# Altium PCB Panel_Drum_Water_Op3.PcbDoc
Units mm, origin at the board's own origin, x right, y up, seen from the top; angles counter-clockwise.
Board outline 285 x 285 mm, 2 copper layers (Top Layer, Bottom Layer); 19 components, 0 nets, 83 pads, 0 vias.
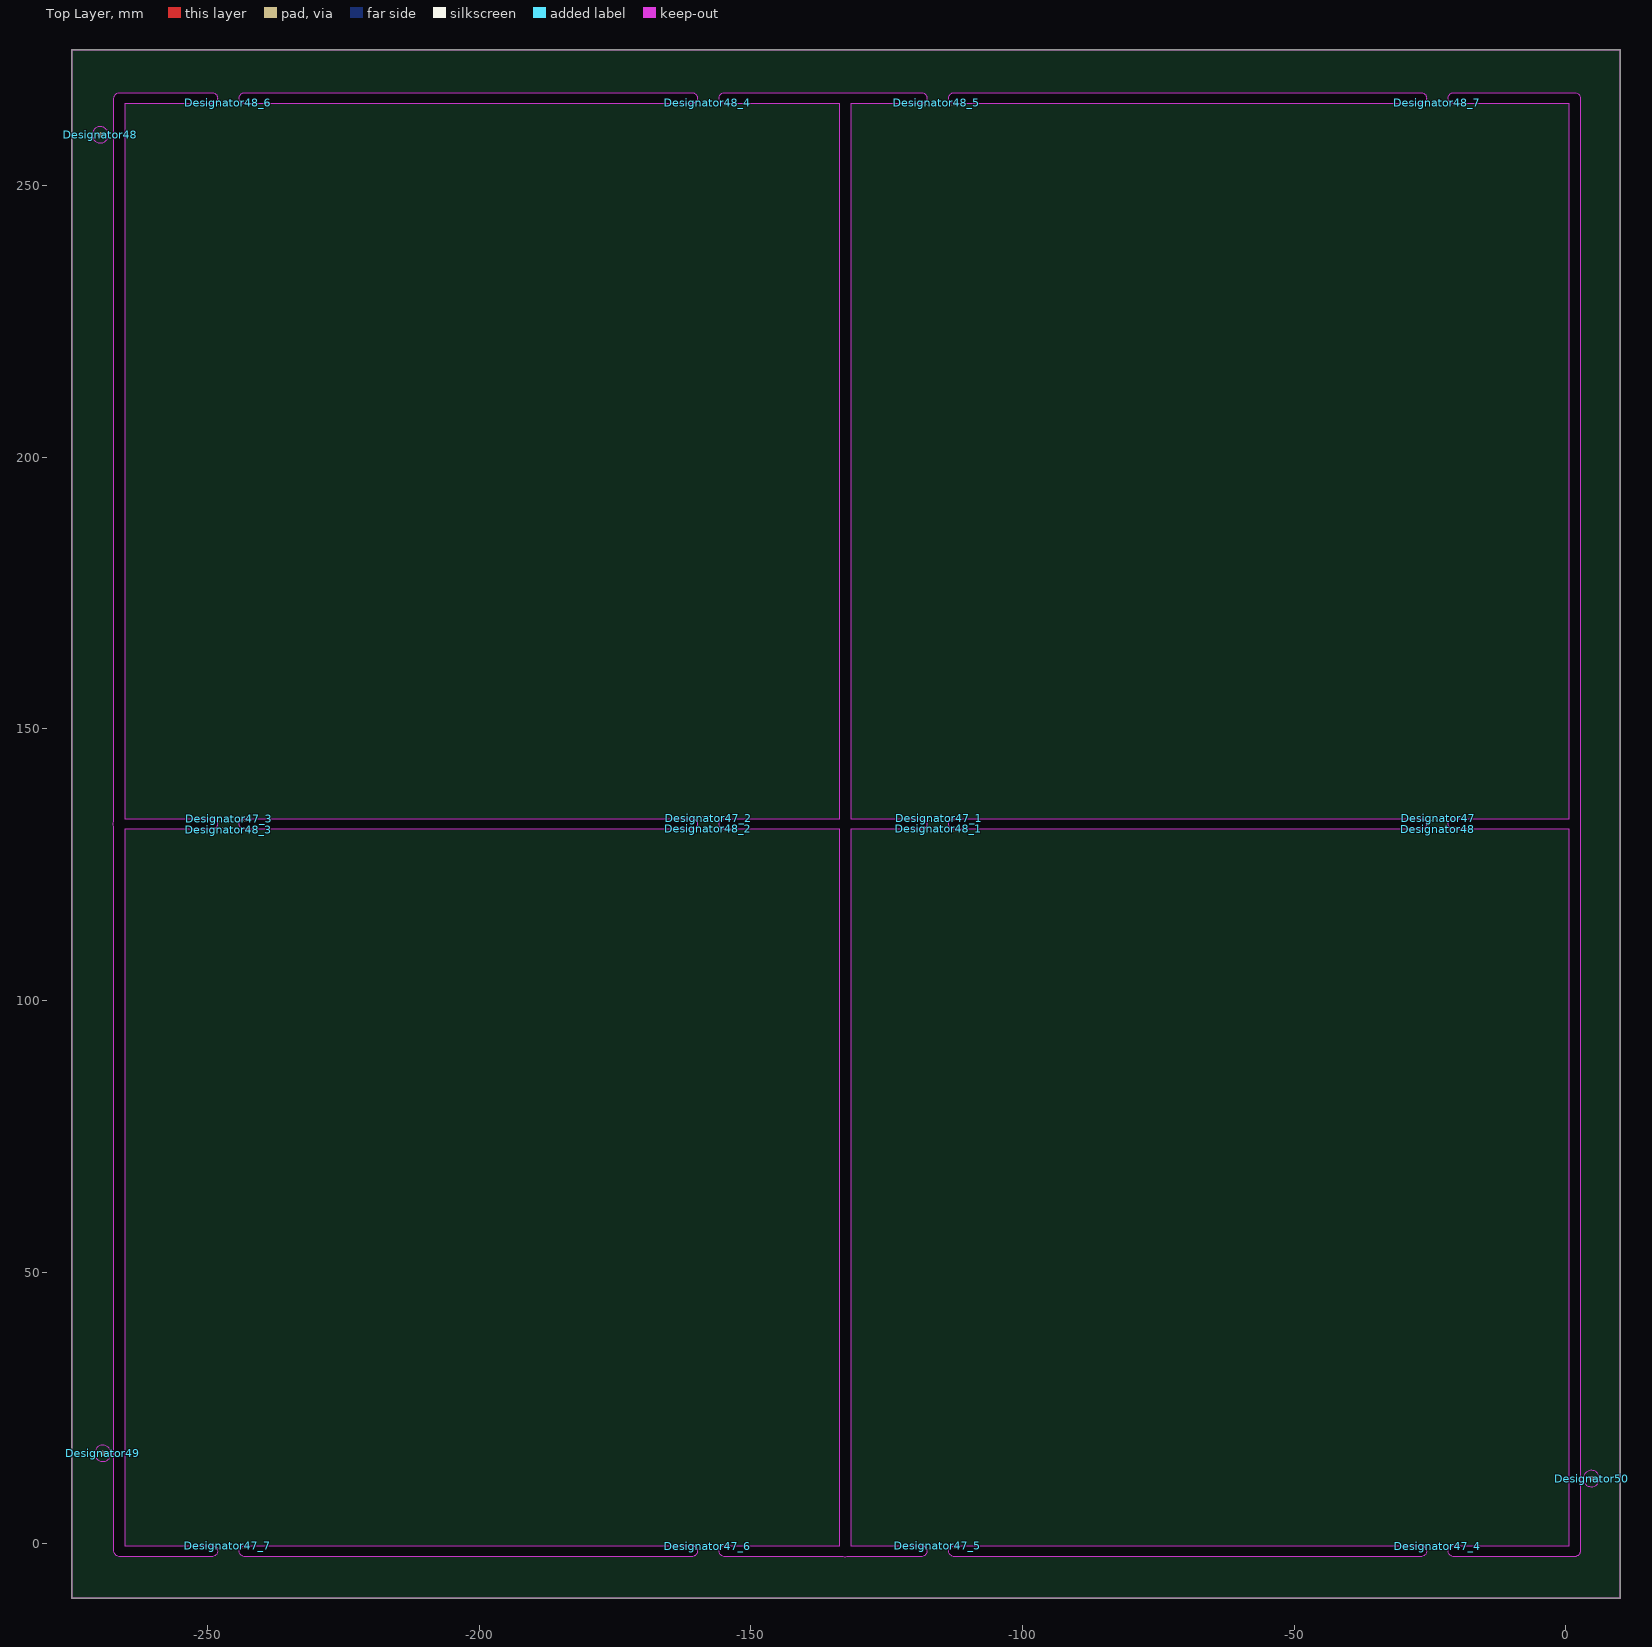
[diagram p0: Top Layer view]
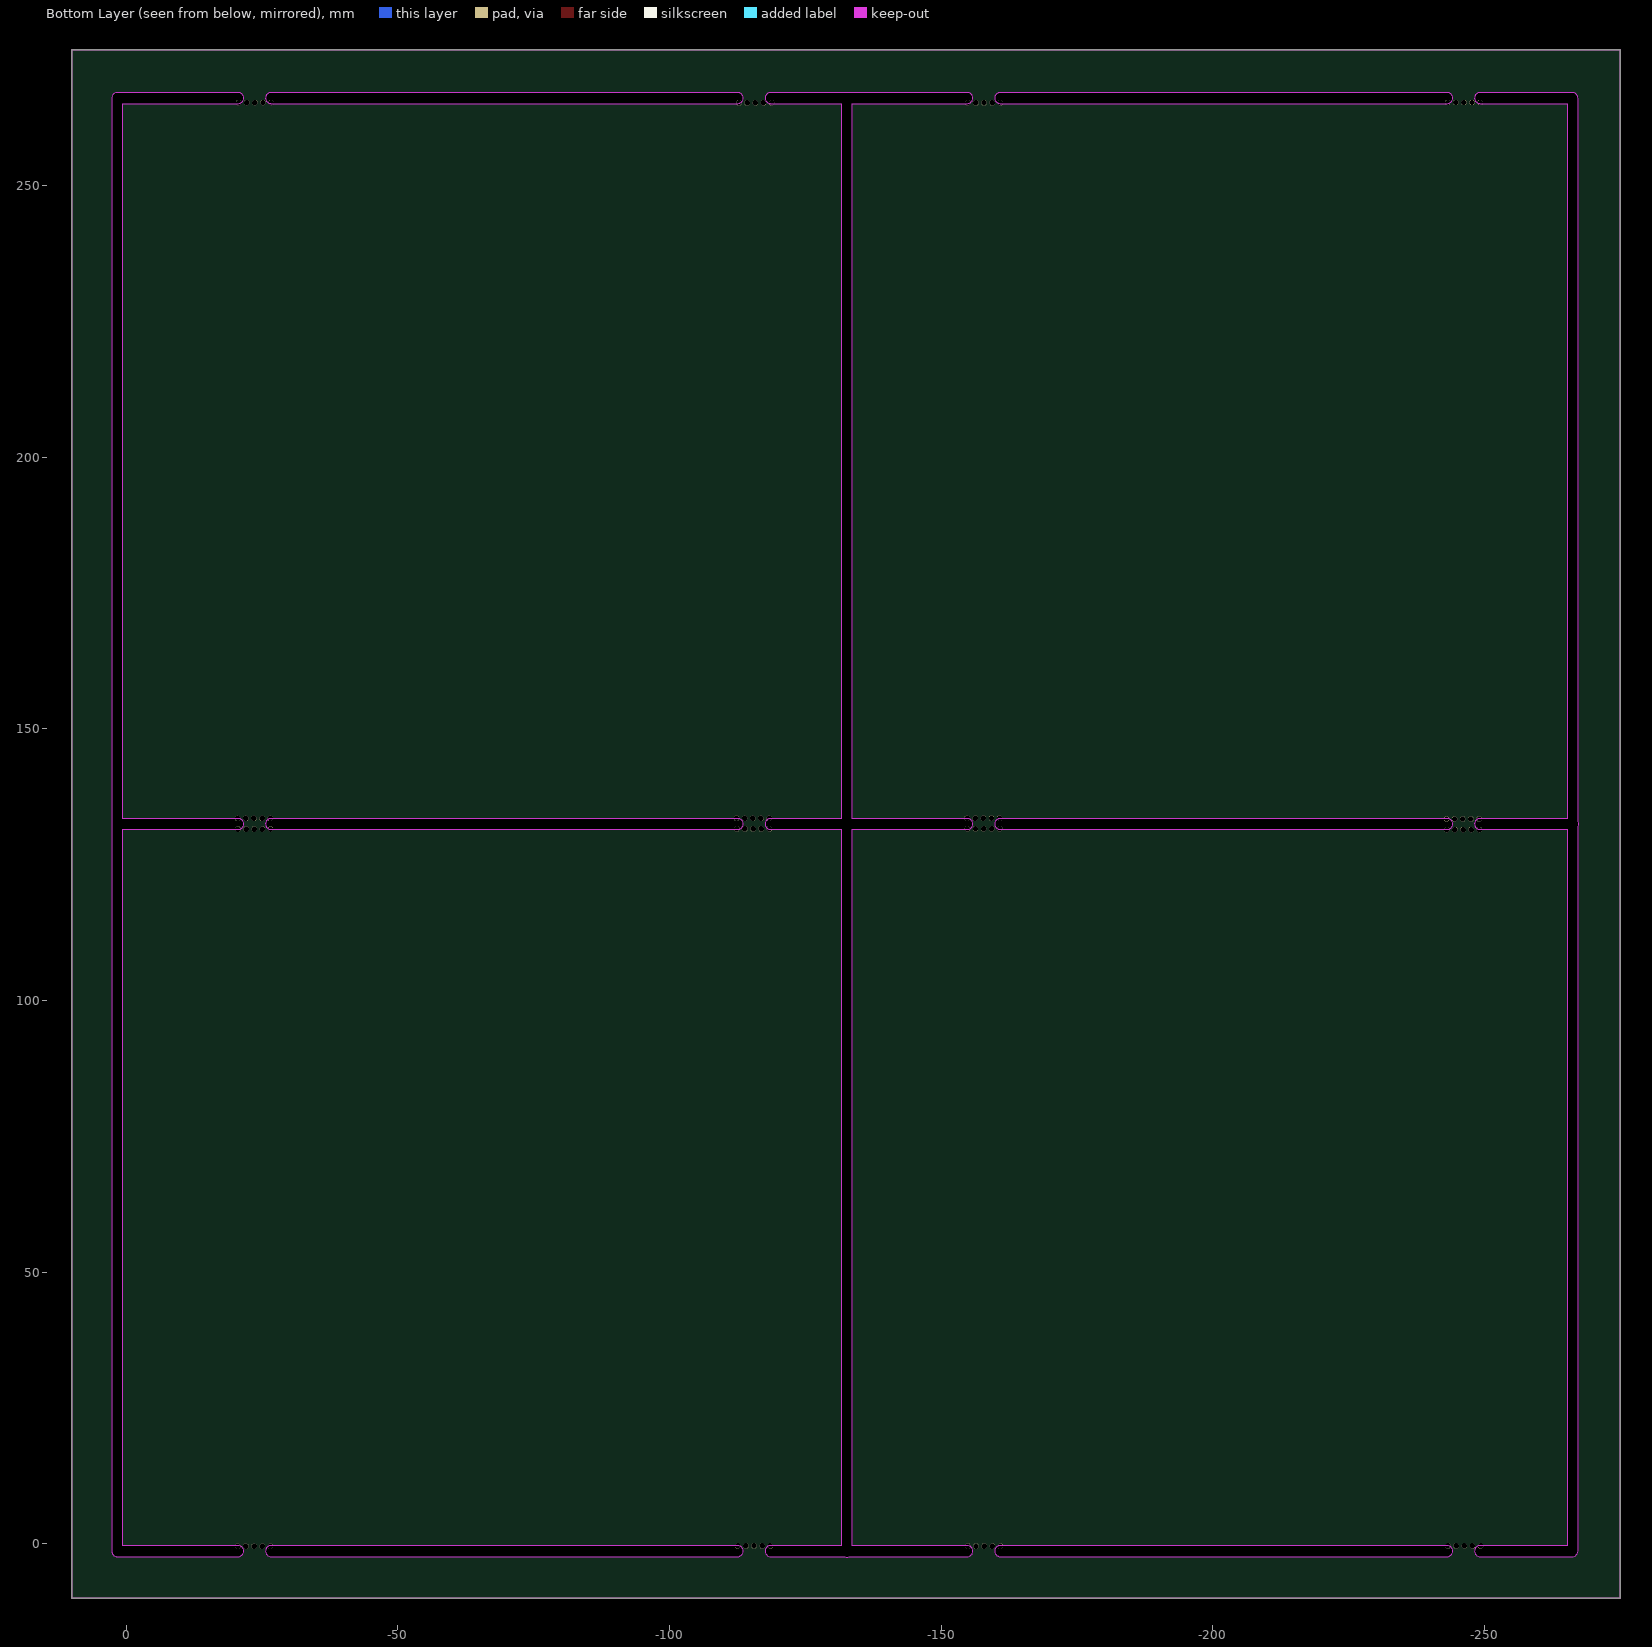
[diagram p1: Bottom Layer view, seen from below]

## Layer stack, top to bottom
Top Solder: solder mask 0.0102, Solder Resist, Dk 3.5
Top Layer: signal copper 0.0356
Dielectric 1: dielectric 0.32, FR-4, Dk 4.8
Bottom Layer: signal copper 0.0356
Bottom Solder: solder mask 0.0102, Solder Resist, Dk 3.5

## Board outline
-275,-10 -275,262.495 -275,275 10,275 10,-10
cut-out: -112.598,265.141 cw(c-112.598,266.141) -112.598,267.142 -26.619,267.142 cw(c-26.619,266.141) -25.619,266.141 cw(c-26.619,266.141) -26.619,265.141
cut-out: -267.269,-1.372 -267.269,131.942 cw(c-266.446,132.512) -267.269,133.081 -267.269,266.141 cw(c-266.268,266.141) -266.268,267.142 -249.199,267.142 cw(c-249.199,266.141) -248.199,266.141 cw(c-249.199,266.141) -249.199,265.141 -265.268,265.141 -265.268,133.512 -249.199,133.512 cw(c-249.199,132.512) -248.199,132.512 cw(c-249.199,132.512) -249.199,131.511 -265.268,131.511 -265.268,-0.371 -249.199,-0.371 cw(c-249.199,-1.372) -248.199,-1.372 cw(c-249.199,-1.372) -249.199,-2.372 -266.268,-2.372 cw(c-266.268,-1.372)
cut-out: -243.205,265.141 cw(c-243.205,266.141) -243.205,267.142 -160.858,267.142 cw(c-160.858,266.141) -159.858,266.141 cw(c-160.858,266.141) -160.858,265.141
cut-out: -243.205,131.511 cw(c-243.205,132.512) -243.205,133.512 -160.858,133.512 cw(c-160.858,132.512) -159.858,132.512 cw(c-160.858,132.512) -160.858,131.511
cut-out: -243.205,-2.372 cw(c-243.205,-1.372) -243.205,-0.371 -160.858,-0.371 cw(c-160.858,-1.372) -159.858,-1.372 cw(c-160.858,-1.372) -160.858,-2.372
cut-out: -112.598,-2.372 cw(c-112.598,-1.372) -112.598,-0.371 -26.619,-0.371 cw(c-26.619,-1.372) -25.619,-1.372 cw(c-26.619,-1.372) -26.619,-2.372
cut-out: -20.625,-2.372 cw(c-20.625,-1.372) -20.625,-0.371 0.676,-0.371 0.676,131.511 -20.625,131.511 cw(c-20.625,132.512) -20.625,133.512 0.676,133.512 0.676,265.141 -20.625,265.141 cw(c-20.625,266.141) -20.625,267.142 1.676,267.142 cw(c1.676,266.141) 2.677,266.141 2.677,-1.372 cw(c1.676,-1.372) 1.676,-2.372
cut-out: -112.598,131.511 cw(c-112.598,132.512) -112.598,133.512 -26.619,133.512 cw(c-26.619,132.512) -25.619,132.512 cw(c-26.619,132.512) -26.619,131.511
cut-out: -154.864,-2.372 cw(c-154.864,-1.372) -154.864,-0.371 -133.665,-0.371 -133.665,131.511 -154.864,131.511 cw(c-154.864,132.512) -154.864,133.512 -133.665,133.512 -133.665,265.141 -154.864,265.141 cw(c-154.864,266.141) -154.864,267.142 -118.593,267.142 cw(c-118.593,266.141) -117.592,266.141 cw(c-118.593,266.141) -118.593,265.141 -131.664,265.141 -131.664,133.512 -118.593,133.512 cw(c-118.593,132.512) -117.592,132.512 cw(c-118.593,132.512) -118.593,131.511 -131.664,131.511 -131.664,-0.371 -118.593,-0.371 cw(c-118.593,-1.372) -117.592,-1.372 cw(c-118.593,-1.372) -118.593,-2.372 -132.225,-2.372 cw(c-132.664,-1.473) -133.103,-2.372

## Design rules (kind name [scope] priority, off if disabled: settings)
Clearance [All] p1: gap=0.254 ignorepadtopadclearanceinfootprint=FALSE except(0: Arc-Hole Track-Hole SMDPad-Hole THPad-Hole Via-Hole Fill-Hole Poly-Hole Region-Hole Text-Hole)
PolygonConnect [All] p1: connectstyle=Relief reliefconductorwidth=0.254 reliefentries=4 polygonreliefangle="90 Angle" airgapwidth=0.254
RoutingVias [All] p1: holewidth=0.711 width=1.27 viastyle="Through Hole" minholewidth=0.711 minwidth=1.27 maxholewidth=0.711 maxwidth=1.27
SolderMaskExpansion [All] p1: expansion=0.102 istentingtop=FALSE
Width [All] p1: maxlimit=0.254 minlimit=0.254 preferedwidth=0.254
30 further rules are at their usual default settings.

## Components (designator, comment, footprint, x,y, rotation, side; value= is the part's Value field where it differs from the comment)
Designator47 "Comment" "Stamp Hole" -26.495,133.528 r0 top
Designator47_1 "Comment" "Stamp Hole" -118.341,133.553 r0 top
Designator47_2 "Comment" "Stamp Hole" -160.785,133.579 r0 top
Designator47_3 "Comment" "Stamp Hole" -249.05,133.426 r0 top
Designator47_4 "Comment" "Stamp Hole" -26.52,-0.457 r0 top
Designator47_5 "Comment" "Stamp Hole" -118.565,-0.416 r0 top
Designator47_6 "Comment" "Stamp Hole" -160.932,-0.441 r0 top
Designator47_7 "Comment" "Stamp Hole" -249.324,-0.416 r0 top
Designator48 "Comment" FUDICIAL_MARKER -269.799,259.385 r0 top
Designator48 "Comment" "Stamp Hole" -26.546,131.572 r0 top
Designator48_1 "Comment" "Stamp Hole" -118.392,131.597 r0 top
Designator48_2 "Comment" "Stamp Hole" -160.836,131.623 r0 top
Designator48_3 "Comment" "Stamp Hole" -249.101,131.47 r0 top
Designator48_4 "Comment" "Stamp Hole" -160.912,265.252 r0 top
Designator48_5 "Comment" "Stamp Hole" -118.799,265.252 r0 top
Designator48_6 "Comment" "Stamp Hole" -249.253,265.328 r0 top
Designator48_7 "Comment" "Stamp Hole" -26.673,265.303 r0 top
Designator49 "Comment" FUDICIAL_MARKER -269.316,16.637 r0 top
Designator50 "Comment" FUDICIAL_MARKER 4.75,11.989 r0 top

## Footprints (in the part's own frame and the unit in brackets; to place one, negate y for a bottom-side part, rotate by r counter-clockwise, add the part's x,y. Pads: shape width x height; smd on the part's side, far side on the other; paste and mask are expansions set on the pad)
FUDICIAL_MARKER [mm]
  round 1 smd paste-1 mask+1: 4(0,0)
  Top Layer pour cut-out: 0.622,1.511 1.5,0.634 1.5,-0.634 0.622,-1.511 -0.622,-1.511 -1.511,-0.622 -1.511,0.622 -0.622,1.511
  Top Layer keep-out circle w0.01: c0,0 r1.5
"Stamp Hole" [mm]
  round 1 hole 1 mask+0.102: 5(0,0) 5(1.5,0) 5(3,0) 5(4.5,0) 5(6,0)

## Nets (pads, with @x,y where several pads share a name; then routed paths per layer and width w, separated by ;. In a path a pad name is that pad's centre, name@x,y a point inside that pad or via, vN(x,y) a via of type N, cw(c..) or ccw(c..) an arc to the next point about the centre after c; other vN are vias at no path point)
pads on no net: Designator47.5 Designator47_1.5 Designator47_2.5 Designator47_3.5 Designator47_4.5 Designator47_5.5 Designator47_6.5 Designator47_7.5 Designator48.4 Designator48.5 Designator48_1.5 Designator48_2.5 Designator48_3.5 Designator48_4.5 Designator48_5.5 Designator48_6.5 Designator48_7.5 Designator49.4 Designator50.4

## Keep-outs
Keep-Out Layer:
  the board outline again, w0.254

## Silkscreen, mask and mechanical layers (free items; w line width, h text height)
Mechanical 1:
  lines w2: -266.446,132.512 -249.199,132.512 ; -249.199,-1.372 -266.268,-1.372 -266.268,266.141 -249.199,266.141 ; -243.205,-1.372 -160.858,-1.372 ; -243.205,132.512 -160.858,132.512 ; -243.205,266.141 -160.858,266.141 ; -154.864,-1.372 -118.593,-1.372 ; -154.864,132.512 -118.593,132.512 ; -154.864,266.141 -118.593,266.141 ; -132.664,-1.473 -132.664,265.989 ; -112.598,-1.372 -26.619,-1.372 ; -112.598,132.512 -26.619,132.512 ; -112.598,266.141 -26.619,266.141 ; -20.625,-1.372 1.676,-1.372 1.676,266.141 -20.625,266.141 ; -20.625,132.512 1.397,132.512

## Panel: embedded boards
"PCB3.PcbDoc" at -0.016,-0.026, 2 rows x 2 columns, spacing 135 x 135, rotation 90